# Altium PCB leboard.PcbDoc
Units mil, origin at the board's own origin, x right, y up, seen from the top; angles counter-clockwise.
Board outline 3500 x 3500 mil, 2 copper layers (Top Layer, Bottom Layer); 54 components, 58 nets, 178 pads, 40 vias.
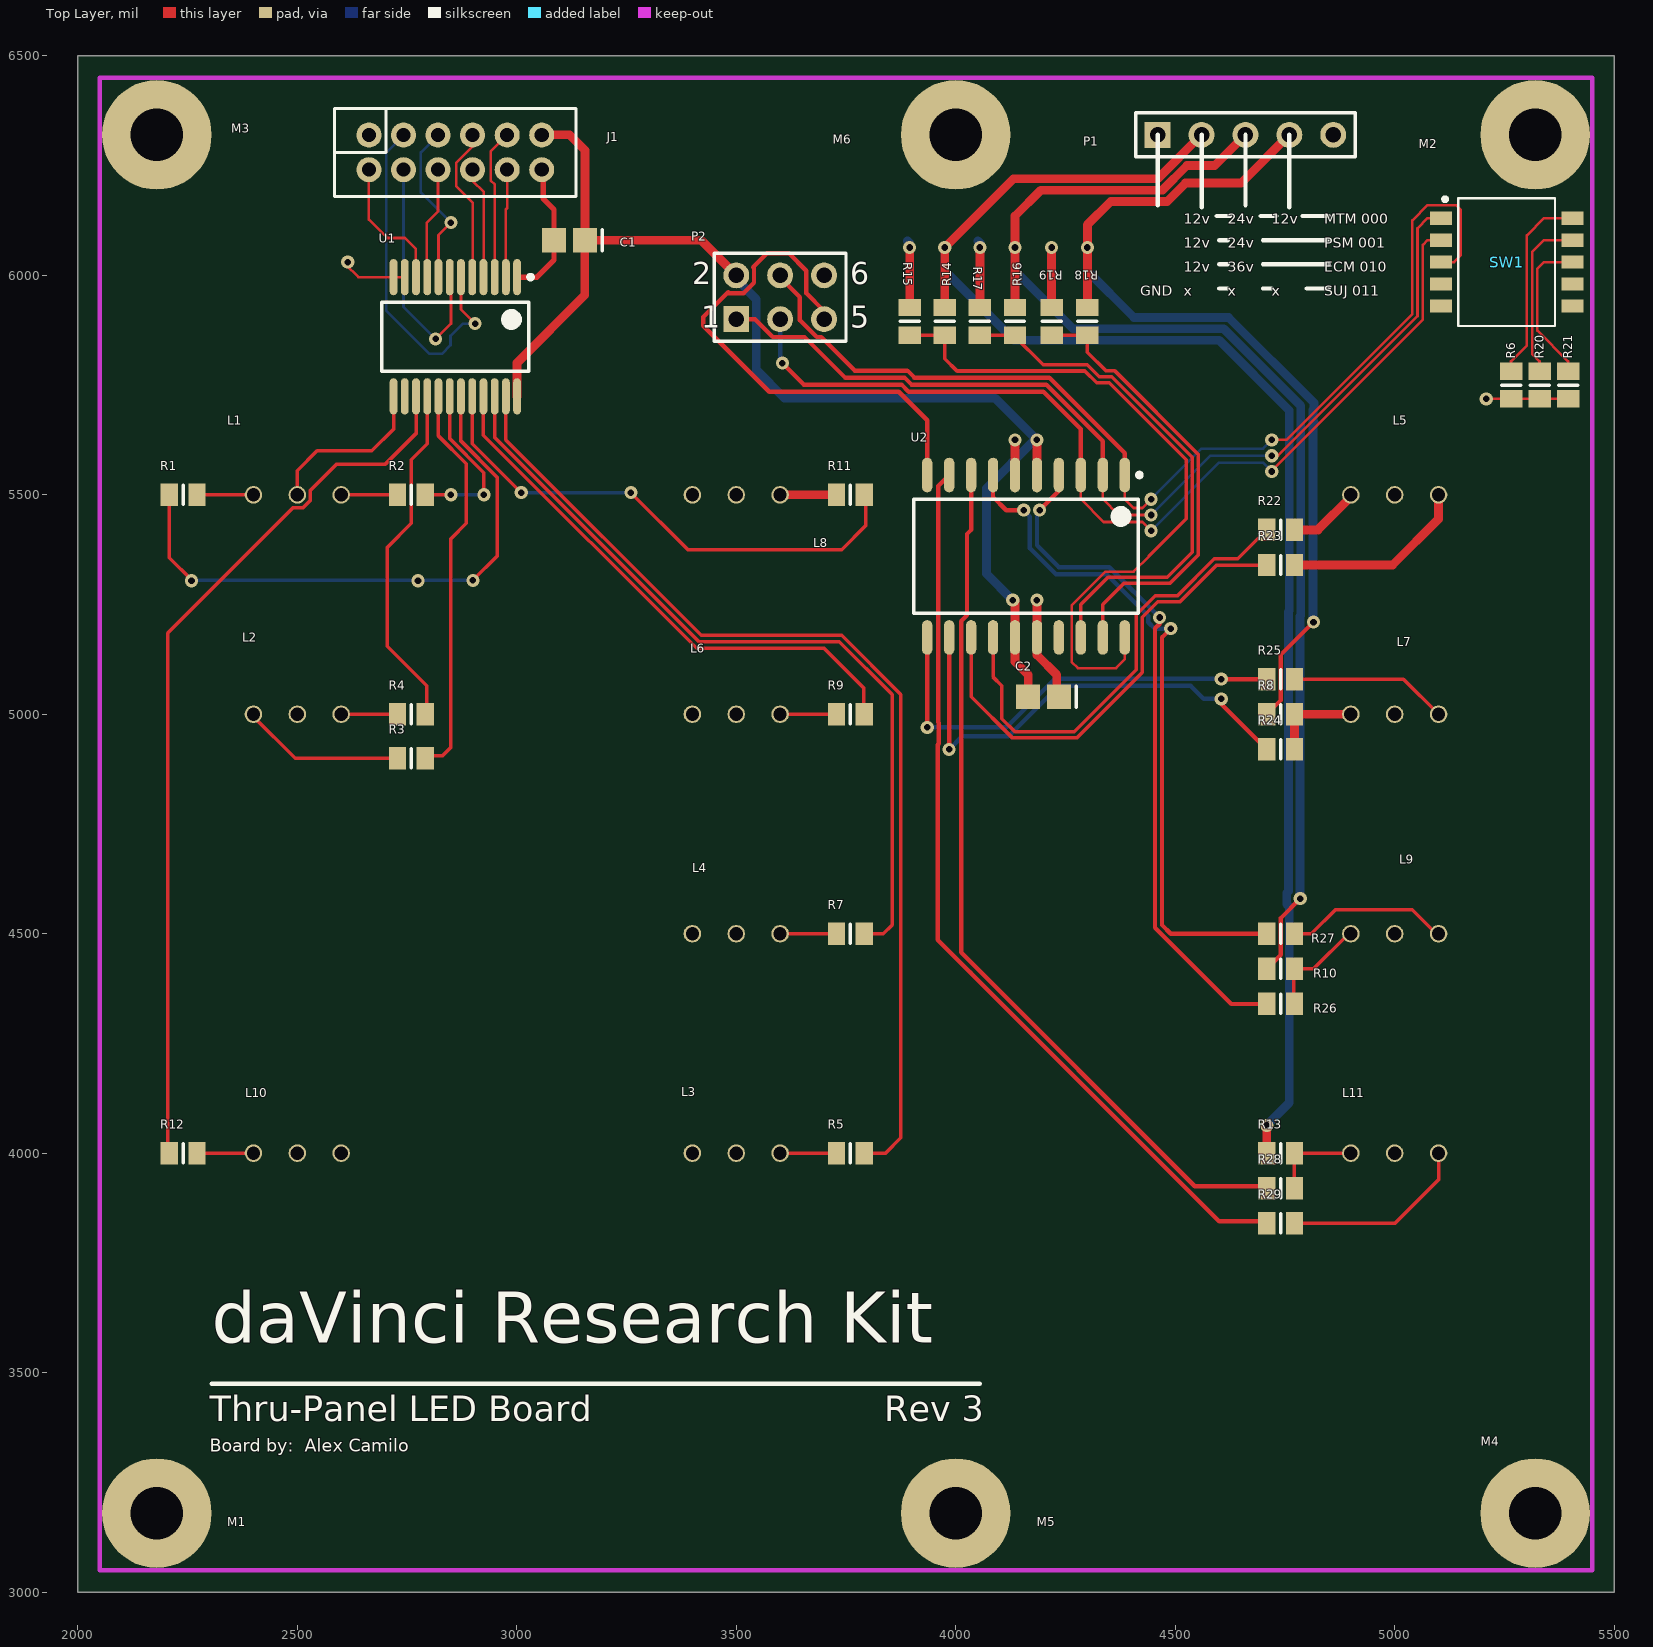
[diagram p0: Top Layer view]
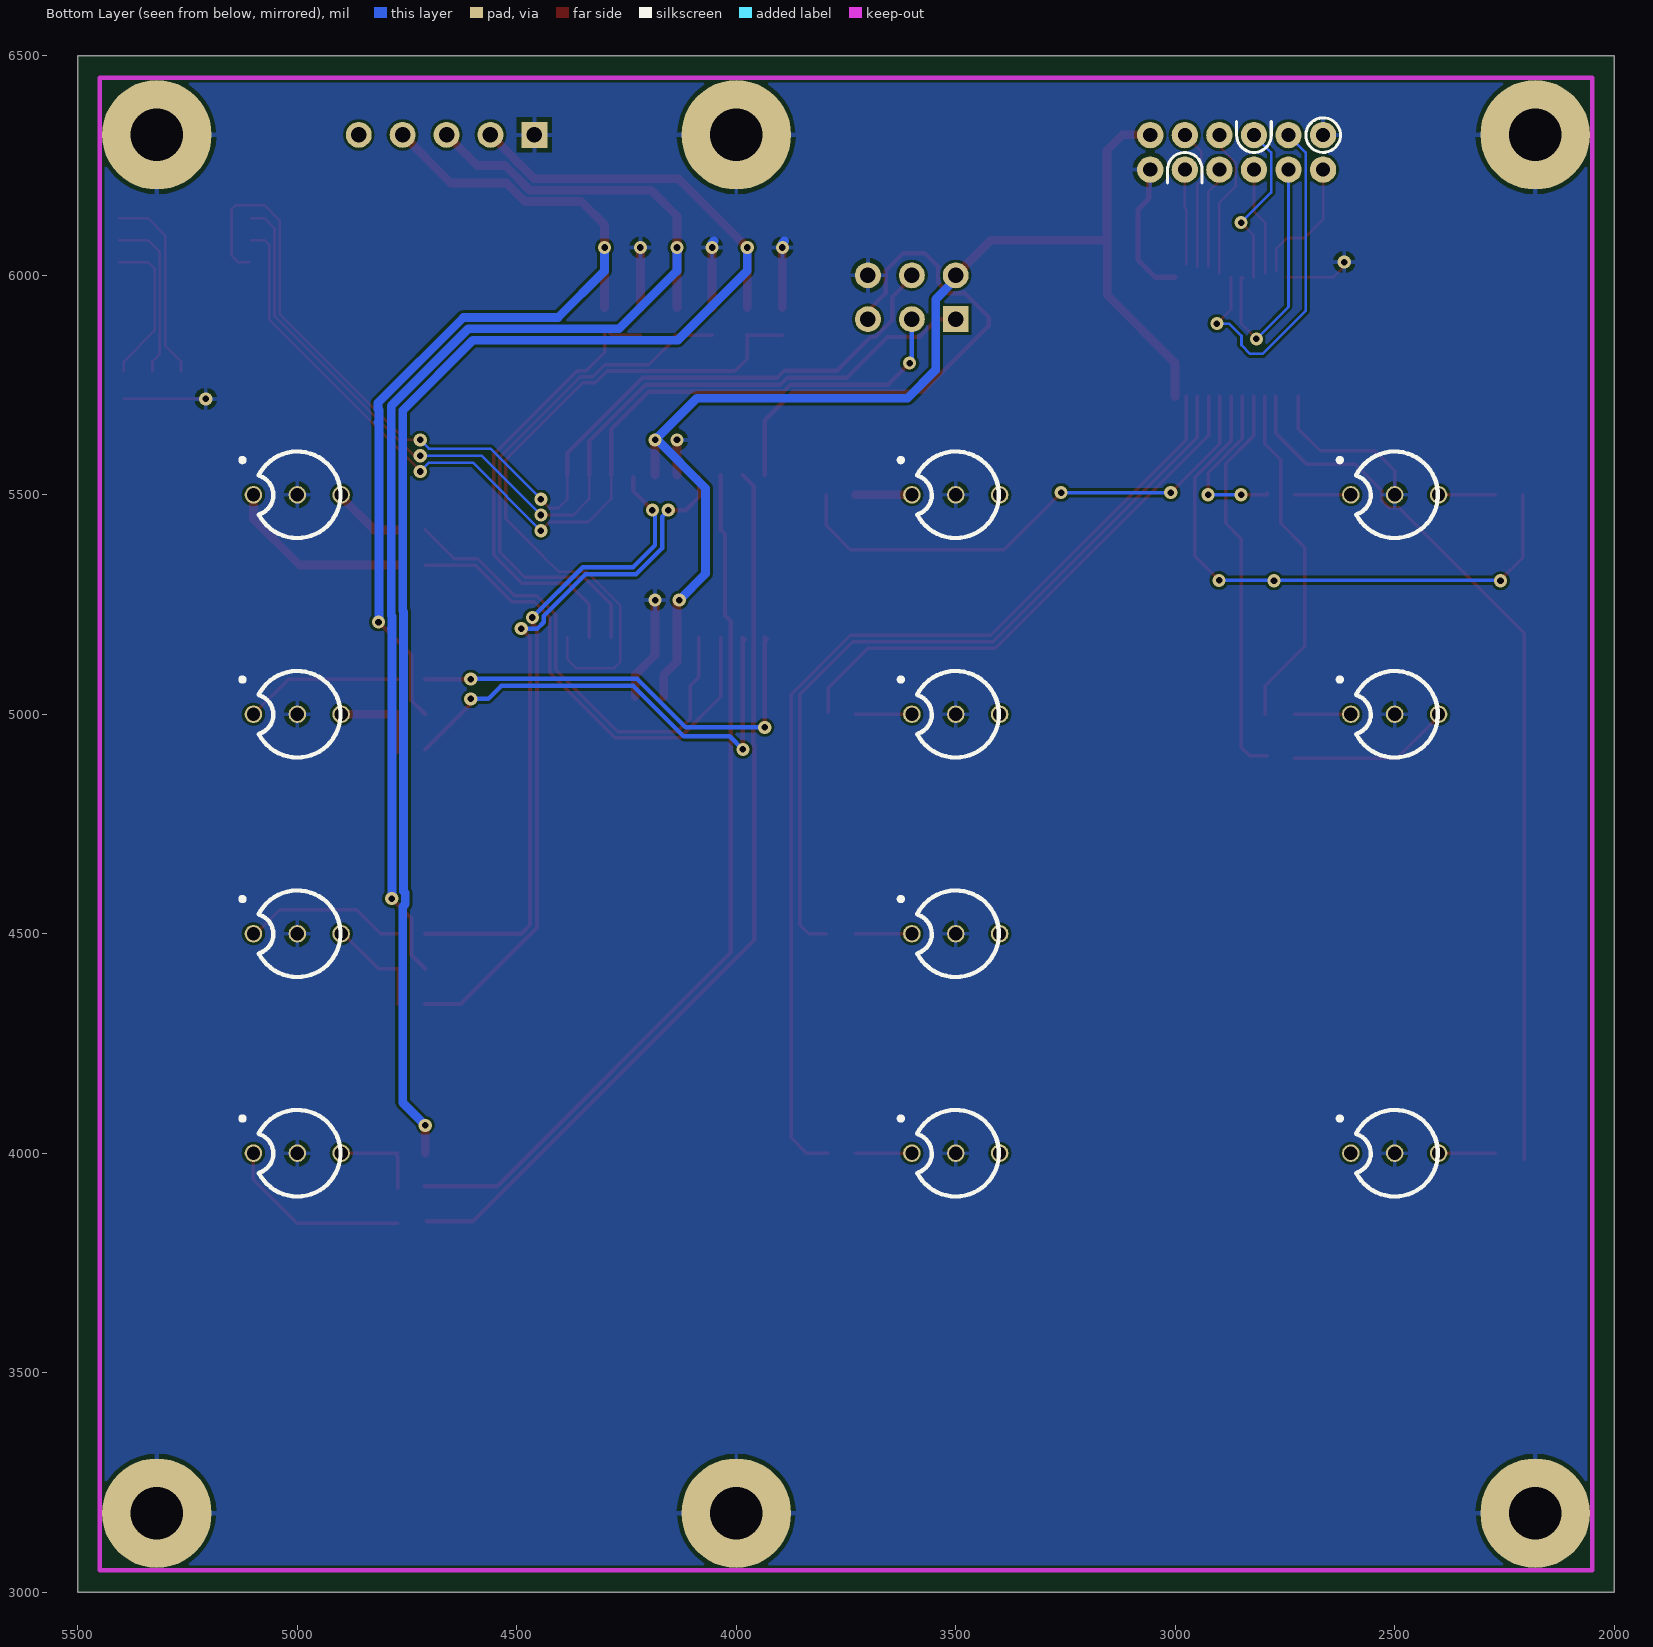
[diagram p1: Bottom Layer view, seen from below]

## Layer stack, top to bottom
Top Solder: solder mask 0.4, Solder Resist, Dk 3.5
Top Layer: signal copper 1.4
Dielectric1: dielectric 12.6, FR-4, Dk 4.8
Bottom Layer: signal copper 1.4
Bottom Solder: solder mask 0.4, Solder Resist, Dk 3.5

## Board outline
2000,3000 5500,3000 5500,6500 2000,6500

## Design rules (kind name [scope] priority, off if disabled: settings)
Clearance [All] p1: gap=6
HoleSize [All] p1: absolutevalues=TRUE maxlimit=300 minlimit=1 maxpercent=80.000 minpercent=20.000
HoleToHoleClearance [All] p1: gap=6 allowstackedmicrovias=TRUE
MinimumSolderMaskSliver [All] p1: minsoldermaskwidth=3
PolygonConnect [All] p1: connectstyle=Relief reliefconductorwidth=10 reliefentries=4 polygonreliefangle="90 Angle" airgapwidth=10
RoomDefinition board [InComponentClass('board')] p1: confinementstyle=ConfineIn formatcopy=TRUE lockcomponents=FALSE outline 0,0 2000,0 2000,1000 0,1000
RoutingVias [All] p1: holewidth=15 width=30 viastyle="Through Hole" minholewidth=15 minwidth=30 maxholewidth=200 maxwidth=200
SilkToSilkClearance [All] p1: silktosilkclearance=0
SilkToSolderMaskClearance SilkscreenOverComponentPads [IsPad] p1: minsilkscreentomaskgap=0 clearancetoexposedcopper=TRUE
SolderMaskExpansion [All] p1: expansion=4
Width [All] p1: maxlimit=50 minlimit=6 preferedwidth=6 minimp=50.000000 maximp=50.000000 favimp=50.000000
25 further rules are at their usual default settings.

## Components (designator, comment, footprint, x,y, rotation, side; value= is the part's Value field where it differs from the comment)
C1 "Cap Semi" CAPC2512L 3120,6080 r180 top
C2 "Cap Semi" CAPC2512L 4200,5040 r180 top
J1 "DF-11" HDR-6x2-2MM 2860,6280 r0 top
L1 "LTL-30EHJ" LTL-30EHJ 2500,5500 r0 top locked
L2 "LTL-30EHJ" LTL-30EHJ 2500,5000 r0 top locked
L3 "LTL-30EHJ" LTL-30EHJ 3500,4000 r0 top locked
L4 "LTL-30EHJ" LTL-30EHJ 3500,4500 r0 top locked
L5 "LTL-30EHJ" LTL-30EHJ 5000,5500 r0 top locked
L6 "LTL-30EHJ" LTL-30EHJ 3500,5000 r0 top locked
L7 "LTL-30EHJ" LTL-30EHJ 5000,5000 r0 top locked
L8 "LTL-30EHJ" LTL-30EHJ 3500,5500 r0 top locked
L9 "LTL-30EHJ" LTL-30EHJ 5000,4500 r0 top locked
L10 "LTL-30EHJ" LTL-30EHJ 2500,4000 r0 top locked
L11 "LTL-30EHJ" LTL-30EHJ 5000,4000 r0 top locked
M1 "MHOLE" MHOLE4 2180,3180 r0 top
M2 "MHOLE" MHOLE4 5320,6320 r0 top
M3 "MHOLE" MHOLE4 2180,6320 r0 top
M4 "MHOLE" MHOLE4 5320,3180 r0 top
M5 "MHOLE" MHOLE4 4000,3180 r0 top
M6 "MHOLE" MHOLE4 4000,6320 r0 top
P1 "Header 5" HDR1X5 4460,6320 r0 top
P2 "Header 3X2" HDR2X3 3500,5900 r0 top
R1 "Res Semi" RESC2012L 2240,5500 r0 top
R2 "Res Semi" RESC2012L 2760,5500 r180 top
R3 "Res Semi" RESC2012L 2760,4900 r180 top
R4 "Res Semi" RESC2012L 2760,5000 r180 top
R5 "Res Semi" RESC2012L 3760,4000 r180 top
R6 "Res Semi" RESC2012L 5265,5750 r90 top
R7 "Res Semi" RESC2012L 3760,4500 r180 top
R8 "Res Semi" RESC2012L 4740,5000 r0 top
R9 "Res Semi" RESC2012L 3760,5000 r180 top
R10 "Res Semi" RESC2012L 4740,4420 r0 top
R11 "Res Semi" RESC2012L 3760,5500 r180 top
R12 "Res Semi" RESC2012L 2240,4000 r0 top
R13 "Res Semi" RESC2012L 4740,4000 r0 top
R14 "Res Semi" RESC2012L 3975,5895 r90 top
R15 "Res Semi" RESC2012L 3895,5895 r270 top
R16 "Res Semi" RESC2012L 4135,5895 r90 top
R17 "Res Semi" RESC2012L 4055,5895 r270 top
R18 "Res Semi" RESC2012L 4300,5895 r90 top
R19 "Res Semi" RESC2012L 4218.33,5895 r270 top
R20 "Res Semi" RESC2012L 5330,5750 r90 top
R21 "Res Semi" RESC2012L 5395,5750 r90 top
R22 "Res Semi" RESC2012L 4740,5420 r0 top
R23 "Res Semi" RESC2012L 4740,5340 r0 top
R24 "Res Semi" RESC2012L 4740,4920 r0 top
R25 "Res Semi" RESC2012L 4740,5080 r0 top
R26 "Res Semi" RESC2012L 4740,4340 r0 top
R27 "Res Semi" RESC2012L 4740,4500 r0 top
R28 "Res Semi" RESC2012L 4740,3920 r0 top
R29 "Res Semi" RESC2012L 4740,3840 r0 top
SW1 "416131160805" 416131160805 5255,6030 r270 top
U1 "SN74LVC827ADBLE" DB024_N 2860,5860 r270 top
U2 "ATtiny26L-8SC" 20S_N 4160,5360 r270 top

## Footprints (in the part's own frame and the unit in brackets; to place one, negate y for a bottom-side part, rotate by r counter-clockwise, add the part's x,y. Pads: shape width x height; smd on the part's side, far side on the other; paste and mask are expansions set on the pad)
20S_N [mm] "SOIC, 20-Leads, Body 12.8x7.5mm, Pitch 1.27mm, IPC Medium Density"
  oval 2x0.6 smd: 1(-4.7,5.715) 2(-4.7,4.445) 3(-4.7,3.175) 4(-4.7,1.905) 5(-4.7,0.635) 6(-4.7,-0.635) 7(-4.7,-1.905) 8(-4.7,-3.175) 9(-4.7,-4.445) 10(-4.7,-5.715) 11(4.7,-5.715) 12(4.7,-4.445) 13(4.7,-3.175) 14(4.7,-1.905) 15(4.7,-0.635) 16(4.7,0.635) 17(4.7,1.905) 18(4.7,3.175) 19(4.7,4.445) 20(4.7,5.715)
  silkscreen extent -4.82,-6.5 3.3,6.69, body extent -3.8,-6.5 3.8,6.5, height 2.67
416131160805 [mm] "05p, 1.27mm Pitch, Horizontal, HP Type, SMT, flat Actuator, black, with Tape, T&R"
  rect 0.76x1.27 smd: 1(-2.54,-3.81) 2(-1.27,-3.81) 3(0,-3.81) 4(1.27,-3.81) 5(2.54,-3.81) 6(2.54,3.81) 7(1.27,3.81) 8(0,3.81) 9(-1.27,3.81) 10(-2.54,3.81)
  silkscreen extent -3.74,-3.66 3.69,2.8, body extent -3.69,-4 3.7,4, height 2.06
CAPC2512L [mm] "Chip Capacitor, Body 2.54x1.27mm, IPC High Density"
  rect 1.4x1.4 smd: 1(-0.9,0) 2(0.9,0)
  silkscreen extent -1.9,-0.6 -1.9,0.6, body extent -1.45,-0.82 1.45,0.82, height 1.3
DB024_N [mm] "SOP, 24-Leads, Body 8.2x5.3mm, Pitch 0.65mm, IPC Medium Density"
  oval 2.1x0.45 smd: 1(-3.45,3.575) 2(-3.45,2.925) 3(-3.45,2.275) 4(-3.45,1.625) 5(-3.45,0.975) 6(-3.45,0.325) 7(-3.45,-0.325) 8(-3.45,-0.975) 9(-3.45,-1.625) 10(-3.45,-2.275) 11(-3.45,-2.925) 12(-3.45,-3.575) 13(3.45,-3.575) 14(3.45,-2.925) 15(3.45,-2.275) 16(3.45,-1.625) 17(3.45,-0.975) 18(3.45,-0.325) 19(3.45,0.325) 20(3.45,0.975) 21(3.45,1.625) 22(3.45,2.275) 23(3.45,2.925) 24(3.45,3.575)
  silkscreen extent -3.57,-4.25 2,4.48, body extent -2.7,-4.25 2.7,4.25, height 2
HDR1X5 [mm] "Connector; Header; 5 Position"
  rect 1.5x1.5 hole 0.9: 1(0,0)
  round 1.5 hole 0.9: 2(2.54,0) 3(5.08,0) 4(7.62,0) 5(10.16,0)
  silkscreen extent -1.27,-1.27 11.43,1.27
HDR2X3 [mm] "Connector; Header; 3x2 Position"
  rect 1.5x1.5 hole 0.9: 1(0,0)
  round 1.5 hole 0.9: 2(0,2.54) 3(2.54,0) 4(2.54,2.54) 5(5.08,0) 6(5.08,2.54)
  silkscreen extent -1.27,-1.27 6.35,3.81
HDR-6x2-2MM [mil]
  round 57 / inner round 60 / far side round 60 hole 32: 1(-196.85,39.37) 2(-196.85,-39.37) 3(-118.11,39.37) 4(-118.11,-39.37) 5(-39.37,39.37) 6(-39.37,-39.37) 7(39.37,39.37) 8(39.37,-39.37) 9(118.11,39.37) 10(118.11,-39.37) 11(196.85,39.37) 12(196.85,-39.37)
  silkscreen extent -275,-100 275,100
LTL-30EHJ [mil]
  round 40 hole 30: 1(100,0) 2(0,0) 3(-100,0)
MHOLE4 [mil]
  round 250 / inner round 60 / far side round 250 hole 120: 1(0,0)
RESC2012L [mm] "Chip Resistor, Body 2.0x1.3mm, IPC High Density"
  rect 1x1.3 smd: 1(-0.8,0) 2(0.8,0)
  silkscreen extent 0,-0.55 0,0.55, body extent -1.07,-0.7 1.07,0.7, height 2.54

## Part data
C1 C2: "Capacitor (Semiconductor SIM Model)"
J1: library part "HEADER 6X2-1"
M1 M2 M3 M4 M5 M6: "Mounting Hole"
P1: "Header, 5-Pin"
P2: "Header, 3-Pin, Dual row"
R1 R2 R3 R4 R5 R6 R7 R8 R9 R10 R11 R12 R13 R14 R15 R16 R17 R18 R19 R20 R21 R22 R23 R24 R25 R26 R27 R28 R29: "Semiconductor Resistor"
SW1: library part CMP-1433-00005-1, "WS-DISV 1.27 mm small compact SMD Dip Switch with top tape"
U1: "10-Bit Buffer/Driver with 3-State Outputs"
U2: "8-Bit AVR Microcontroller with 2K Bytes of Flash Memory"

## Via types
v1: diameter 30, hole 15, Top Layer to Bottom Layer, tented both sides, 40 vias

## Nets (pads, with @x,y where several pads share a name; then routed paths per layer and width w, separated by ;. In a path a pad name is that pad's centre, name@x,y a point inside that pad or via, vN(x,y) a via of type N, cw(c..) or ccw(c..) an arc to the next point about the centre after c; other vN are vias at no path point)
/FAULT1: J1.7 U1.5 | length 345.7
  Top Layer w6: J1.7 2899.37,6293.66 2861.87,6256.16 2861.87,6203.13 2899.37,6165.63 2899.37,6005.63 U1.5@2900,6005
/FAULT2: J1.8 U1.4 | length 231.2
  Top Layer w6: J1.8 2899.37,6215.13 2925,6189.5 U1.4@2925,6020
/FAULT3: J1.9 U1.3 | length 318.8
  Top Layer w6: U1.3@2950,6020 2950,6206.32 2940.61,6215.71 2940.61,6281.87 J1.9
/FAULT4: J1.10 U1.2 | length 216.9
  Top Layer w6: U1.2@2975,6025 2975,6150 2978.11,6153.11 J1.10
BUFF1: R11.1 U1.20 | length 1197
  Top Layer w8: U1.20 2898.39,5616.61 v1(3010,5505) ; v1(3260,5505) 3390,5375 3740,5375 3795,5430 R11.1@3795,5500
  Bottom Layer w8: v1(3010,5505) v1(3260,5505)
BUFF2: R9.1 U1.21 | length 1247.8
  Top Layer w8: U1.21 2923.98,5636.02 3410,5150 3700,5150 3790,5060 R9.1@3790,5005
BUFF3: R7.1 U1.22 | length 1835
  Top Layer w8: U1.22 2949.57,5630.43 3415,5165 3735,5165 3855,5045 3855,4520 3835,4500 R7.1@3795,4500
BUFF4: R5.1 U1.23 | length 2348.8
  Top Layer w8: U1.23 2975.16,5624.84 3420,5180 3740,5180 3875,5045 3875,4035 3840,4000 R5.1 R5.1@3790,4000
BUFFMVGOOD: R12.1 U1.15 | length 2051.5
  Top Layer w8: R12.1@2205,3985 2205,4055 2205,5185 2490,5470 2512.43,5470 2530,5487.57 2530,5510 2590,5570 2700.87,5570 2770.43,5639.57 U1.15
BUFL1G: R1.1 U1.19 | length 1332.3
  Top Layer w8: R1.1 2208.5,5356.5 v1@2260,5305 ; U1.19 2872.8,5622.41 2955,5540.2 2955,5360 v1(2900,5305)
  Bottom Layer w8: v1@2260,5305 v1(2900,5305)
  other v1: 2259,5304 2775,5304
BUFL1R: R2.1 U1.18 | length 396.4
  Top Layer w8: R2.1@2790,5505 2790,5500 R2.1 v1(2850,5500) ; U1.18 2847.2,5628.2 2925,5550.4 v1(2925,5500)
  Bottom Layer w8: v1(2850,5500) v1(2925,5500)
BUFL2G: R3.1 U1.17 | length 908.2
  Top Layer w8: R3.1@2790,4905 2830,4905 2850,4925 2850,5400 2885,5435 2885,5570.6 2821.61,5633.99 U1.17
BUFL2R: R4.1 U1.16 | length 799.2
  Top Layer w8: R4.1@2795,5000 2795,5065 2705,5155 2705,5380 2760,5435 2760,5580 2796.02,5616.02 U1.16
GB1: L5.3 R22.2 | length 159.6
  Top Layer w20: R22.2 4825,5420 L5.3@4900,5495
GB2: L7.3 R8.2 R24.2 | length 187
  Top Layer w20: R24.2 R8.2@4771.5,4983.5 ; R8.2 L7.3@4895,5000
GB3: L9.3 R10.2 R26.2 | length 237.3
  Top Layer w8: R10.2@4770,4420 4770,4341.5 R26.2 ; R10.2 4815,4420 L9.3@4895,4500
GB4: L11.3 R13.2 R28.2 | length 205
  Top Layer w8: R28.2 4771.5,3991.5 R13.2@4775,3995 ; R13.2 L11.3
GND: C1.2 C2.1 J1.1 J1.12 L1.2 L2.2 L3.2 L4.2 L5.2 L6.2 L7.2 L8.2 L9.2 L10.2 L11.2 M1.1 M2.1 M3.1 M4.1 M5.1 M6.1 P1.1 P2.6 R6.1 R15.1 R17.1 R19.1 R20.1 R21.1 U1.1 U1.11 U1.12 U1.13 U2.6 U2.16 | length 1773
  Top Layer w6: v1(2615,6030) 2610,6025 2639.17,5995.83 U1.12 ; U1.12@2720.83,5995.83 U1.11 ; v1(5208.5,5718.5) R6.1 R20.1 R21.1
  Top Layer w8: L1.2@2500,5505 2500,5555 2545,5600 2670,5600 2719.25,5649.25 U1.13
  Top Layer w12: U1.1 3045.83,5995.83 3085,6035 3085,6150 3060,6175 J1.12@3060,6240
  Top Layer w20: R15.1 v1@3895,6060 ; R17.1 v1@4055,6060 ; U2.6 v1(4135,5625) ; v1(4185,5260) U2.16 4185,5135 4230,5090 C2.1@4230,5040 ; R19.1 v1@4218.33,6061.67
  Top Layer w25: J1.12 J1.12@3057,6240.63
  Bottom Layer w20: 3890,6078.33 v1@3895,6073.33 ; 4050,6078.33 v1@4055,6073.33
  other v1: 3895,6063.33 4055,6063.33 4218.33,6063.33
LED1-GRN: J1.3 U1.6 | length 824.2
  Top Layer w6: U1.6 2872.8,5922.2 v1(2905,5890)
  Bottom Layer w6: J1.3@2740,6325 2740,6316.74 2702.89,6279.63 2702.89,5919.03 2800.92,5821 2829.08,5821 2849,5840.92 2849,5862.03 2876.97,5890 v1(2905,5890)
LED1-RED: J1.4 U1.7 | length 573.5
  Top Layer w6: v1(2815,5855) 2850,5890 U1.7@2850,5995 ; U1.7@2845,5993.62 U1.7
  Bottom Layer w6: J1.4 2741.89,5928.11 v1(2815,5855)
LED2-GRN: J1.5 U1.8 | length 385.1
  Top Layer w6: U1.8 2821.61,6091.61 v1(2850,6120)
  Bottom Layer w6: J1.5@2820,6325 2820,6318 2781.63,6279.63 2781.63,6188.37 v1(2850,6120)
LED2-RED: J1.6 U1.9 | length 246.2
  Top Layer w6: U1.9@2795,6005 2795,6120 2820.63,6145.63 J1.6
MISO: P2.1 SW1.1 U2.2 | length 2264.4
  Top Layer w6: U2.2 4335,5490 4371,5454 v1(4445,5454) ; v1(4720,5589) 4734,5589 5052,5907 5052,6107 5075,6130 SW1.1
  Top Layer w10: P2.1 3542.69,5900 3583.21,5859.47 3655.53,5859.47 3748,5767 3883.25,5767 3899.25,5751 4206.37,5751 4335,5622.37 U2.2
  Bottom Layer w6: v1(4445,5454) 4580,5589 v1(4720,5589)
MOSI: P2.4 SW1.3 U2.1 | length 2425.6
  Top Layer w6: U2.1 4385,5490 4405,5470 4425,5470 v1(4445,5490) ; v1(4720,5625) 4753.03,5625 5040,5911.97 5040,6125 5075,6160 5140,6160 5150,6150 5150,6045 5135,6030 SW1.3@5110,6030
  Top Layer w10: P2.4@3600,5995 3645,5950 3645,5897.69 3683.21,5859.47 3693.53,5859.47 3770,5783 3889.88,5783 3905.88,5767 4213,5767 4385,5595 U2.1
  Bottom Layer w6: v1(4445,5490) 4560,5605 4700,5605 v1(4720,5625)
MV-GOOD: J1.2 U1.10 | length 298.3
  Top Layer w6: J1.2 2663.15,6126.85 2705,6085 2745,6085 2770,6060 U1.10@2770,6010
NetL1_1: L1.1 R2.2 | length 137
  Top Layer w8: L1.1 2602,5500 R2.2
  Top Layer w10: L1.1@2596,5506 L1.1@2602,5500
NetL1_3: L1.3 R1.2 | length 128.5
  Top Layer w8: R1.2 L1.3
NetL2_1: L2.1 R4.2 | length 128.5
  Top Layer w8: L2.1 R4.2
NetL2_3: L2.3 R3.2 | length 372.9
  Top Layer w8: L2.3@2405,4995 2400,4995 2495,4900 R3.2
NetL3_1: L3.1 R5.2 | length 128.5
  Top Layer w8: L3.1 R5.2
NetL4_1: L4.1 R7.2 | length 128.5
  Top Layer w8: L4.1 R7.2
NetL5_1: L5.1 R23.2 | length 422
  Top Layer w20: R23.2 4995,5340 5100,5445 L5.1@5100,5495
NetL6_1: L6.1 R9.2 | length 128.5
  Top Layer w8: L6.1 R9.2
NetL7_1: L7.1 R25.2 | length 361.6
  Top Layer w8: R25.2 5020,5080 L7.1
NetL8_1: L8.1 R11.2 | length 128.5
  Top Layer w20: L8.1 R11.2
NetL9_1: L9.1 R27.2 | length 369.1
  Top Layer w8: R27.2 4810,4500 4865,4555 5040,4555 L9.1@5095,4500
NetL10_3: L10.3 R12.2 | length 128.5
  Top Layer w8: R12.2 L10.3
NetL11_1: L11.1 R29.2 | length 429.9
  Top Layer w8: R29.2 5000,3840 5100,3940 L11.1
NetR6_2: R6.2 SW1.10 | length 444.6
  Top Layer w6: R6.2 5265,5804.18 5301,5840.18 5301,6091 5340,6130 SW1.10
NetR20_2: R20.2 SW1.9 | length 381.7
  Top Layer w6: R20.2 5330,5804.18 5313,5821.18 5313,6053 5340,6080 SW1.9
NetR21_2: R21.2 SW1.8 | length 348.7
  Top Layer w6: R21.2 5395,5804.18 5325,5874.18 5325,6015 5340,6030 SW1.8
P1G: R23.1 U2.13 | length 1084.2
  Top Layer w8: U2.13 4035,5040.2 4129.2,4946 4275.8,4946 4425,5095.2 4425,5221 4460,5256 4511,5256 4595,5340 R23.1
P1R: R22.1 U2.14 | length 1073.4
  Top Layer w8: U2.14 4085,5085 4105,5065 4105,4990 4135,4960 4270,4960 4411,5101 4411,5226.8 4454.2,5270 4505.2,5270 4589.2,5354 4642.5,5354 R22.1
P2G: R25.1 U2.11 | length 1025.5
  Top Layer w10: v1@3930,4970 3935,4975 U2.11 ; v1(4605,5080) R25.1
  Bottom Layer w10: v1(3935,4970) 4115,4970 4226,5081 v1@4604,5081
P2R: R24.1 U2.12 | length 1100.3
  Top Layer w10: v1@3985,4925 U2.12 ; v1(4605,5035) 4605,5023.5 R24.1
  Bottom Layer w10: v1(3985,4920) 4015,4950 4120,4950 4235,5065 4535,5065 4565,5035 v1(4605,5035)
P3G: R27.1 U2.7 | length 1568.8
  Top Layer w10: U2.7@4085,5540 4085,5495 4115,5465 v1(4155,5465) v1@4140,5465 ; v1(4490,5195) 4470,5175 4470,4520 4490,4500 R27.1
  Bottom Layer w10: v1@4155,5464 4169,5450 4169,5378.37 4228.37,5319 4343.37,5319 4438.54,5223.83 4438.54,5209.69 4453.77,5194.46 v1@4489.46,5194.46
P3R: R26.1 U2.4 | length 1561.2
  Top Layer w10: v1(4191,5465) 4235,5509 U2.4@4235,5540 ; v1(4464.54,5220.46) 4464.54,5206.31 4454,5195.77 4454,4513.37 4627.37,4340 R26.1
  Bottom Layer w10: v1(4191,5465) 4185,5459 4185,5385 4235,5335 4350,5335 v1(4464.54,5220.46)
P4G: R29.1 U2.9 | length 2085
  Top Layer w10: U2.9 3960,5520.04 3960,4981.77 3961,4980.77 3961,4932.77 3959,4930.77 3959,4486 4035,4410 ; 4033,4412 4035,4410 ; R29.1@4705,3845 4600,3845 4035,4410
P4R: R28.1 U2.8 | length 2015.3
  Top Layer w10: U2.8 4035,5420 4025.55,5410.55 4025.55,5225.33 4012.19,5211.97 4012.19,4457.56 4544.75,3925 R28.1@4710,3925
RST: P2.5 U2.10 | length 1212.2
  Top Layer w10: P2.5@3700,5895 P2.5 3700,5918.94 3659.47,5959.47 3659.47,6010.53 3620,6050 3570,6050 3538.66,6018.66 3540.53,6016.79 3540.53,5983.21 3516.79,5959.47 3483.21,5959.47 3481.34,5961.34 3425,5905 3425,5885 3575,5735 3870,5735 3935,5670 U2.10
SCK: P2.3 SW1.2 U2.3 | length 2247.5
  Top Layer w6: U2.3 4285,5490 4337,5438 4425,5438 v1(4445,5418) ; v1(4720,5553) 4720,5555.06 5064,5899.06 5064,6069 5075,6080 SW1.2
  Top Layer w10: v1(3605,5800) 3654,5751 3876.63,5751 3892.63,5735 4199.75,5735 4285,5649.75 U2.3
  Bottom Layer w6: v1(4445,5418) 4600,5573 4700,5573 v1(4720,5553)
  Bottom Layer w10: P2.3 3600,5810 v1@3610,5800
V1IN: P1.2 R13.1 R14.2 | length 3513.2
  Top Layer w20: R14.2 v1@3975,6060 ; v1(3975,6063.33) 4131.67,6220 4460,6220 P1.2 ; R13.1 v1(4708.5,4063.5)
  Bottom Layer w20: v1(3975,6063.33) 3975,6010 4133,5852 4600,5852 4760,5692 4760,5235.61 4758,5233.61 4758,4596.84 4754,4592.84 4754,4567.16 4760,4561.16 4760,4115 v1(4708.5,4063.5)
V2IN: P1.3 R10.1 R16.2 | length 2955.3
  Top Layer w10: R10.1 4740.81,4452.31 4740.81,4535.81 v1(4785,4580)
  Top Layer w20: R16.2 v1@4135,6060 ; v1@4135,6065 4135,6135 4194,6194 4470.77,6194 4526.77,6250 4590,6250 P1.3
  Bottom Layer w20: v1(4135,6063.33) 4135,6010 4267,5878 4610.77,5878 4786,5702.77 4786,5224.84 4784,5222.84 4784,5197.16 ; v1(4785,4580) 4784,4581 4784,5197.16 ; 4786,5195.16 4784,5197.16
V3IN: P1.4 R8.1 R18.2 | length 2178.5
  Top Layer w10: R8.1 4740,5031.5 4740,5135 v1(4815,5210)
  Top Layer w20: R18.2 v1@4300,6060 ; v1@4300,6065 4300,6115 4353,6168 4481.54,6168 4523.54,6210 4650,6210 P1.4
  Bottom Layer w20: v1(4300,6063.33) 4300,6010 4406,5904 4621.54,5904 4816,5709.54 4816,5694.84 4814,5692.84 4814,5667.16 ; v1@4814,5211 4814,5667.16 ; 4816,5665.16 4814,5667.16
VCC: C1.1 C2.2 J1.11 P2.2 U1.24 U2.5 U2.15 | length 2811.9
  Top Layer w20: U1.24 3000.75,5800.75 3155,5955 C1.1@3155,6085 ; J1.11@3055,6320 3056.22,6320 J1.11 ; J1.11@3070,6320 3120,6320 3155.43,6284.57 C1.1 3420,6080 P2.2 ; v1(4130,5260) 4135,5260 U2.15 4135,5120 4165,5090 C2.2@4165,5040 ; U2.5 v1(4185,5625)
  Bottom Layer w20: P2.2@3505,6005 3505,5986.06 3545.53,5945.53 3545.53,5784.47 3610,5720 4090,5720 v1@4182.5,5627.5 ; v1(4130,5260) 4070,5320 4070,5515 v1@4182.5,5627.5 ; v1(4185,5625) v1@4182.5,5627.5 ; v1@4185,5630 v1@4182.5,5627.5
VS1: R14.1 R15.2 U2.20 | length 1572.7
  Top Layer w6: U2.20 4385,5125 4365,5105 4278.38,5105 4264.19,5119.19 4264.19,5247.57 4341.62,5325 4405,5325 4441,5361
  Top Layer w8: R15.2 R14.1 ; R14.1@3975,5865 R14.1 ; R14.1@3976.5,5863.5 R14.1 ; 4441,5361 4525,5445 4525,5580 4350,5755 4321.21,5755 4294.21,5782 4003,5782 3975,5810 R14.1
VS2: R16.1 R17.2 U2.18 | length 1197.6
  Top Layer w8: R17.2@4055,5865 R17.2 R16.1@4138.5,5863.5 ; R16.1@4135,5860 4199,5796 4300.01,5796 4327.01,5769 4355.8,5769 4539,5585.8 4539,5369.2 4481.8,5312 4347,5312 4285,5250 U2.18
VS3: R18.1 R19.2 U2.19 | length 1037.2
  Top Layer w8: R19.2 4283.5,5863.5 R18.1@4290,5870 ; R18.1@4300,5870 R18.1 4300,5825 4342,5783 4361.6,5783 4553,5591.6 4553,5363.4 4487.6,5298 4383,5298 4335,5250 U2.19
pads on no net: L3.3 L4.3 L6.3 L8.3 L10.1 P1.5 SW1.4 SW1.5 SW1.6 SW1.7 U1.14 U2.17

## Polygon pours and split planes (outlines as drawn)
GND on Bottom Layer "Top Layer-No Net 1" (solid, pour order 1000): 2050,3045 2053,3048 5446,3048 5446,6447 5441,6452 2050,6452

## Keep-outs
Keep-Out Layer:
  lines w10: 2050,3050 2050,6450 5450,6450 5450,3050 2050,3050

## Silkscreen, mask and mechanical layers (free items; w line width, h text height)
Top Overlay:
  lines w10: 2305,3475 4055,3475 ; 4460,6160 4460,6320 ; 4560,6155 4560,6320 ; 4595,6135 4625,6135 ; 4600,5970 4620,5970 ; 4600,6025 4620,6025 ; 4600,6080 4620,6080 ; 4660,6160 4660,6320 ; 4695,6135 4730,6135 ; 4700,5970 4720,5970 ; 4700,6025 4850,6025 ; 4700,6080 4850,6080 ; 4760,6155 4760,6320 ; 4790,6135 4850,6135 ; 4800,5970 4850,5970
  text "12v" at 4520,6110 h40
  text "24v" at 4620,6110 h40
  text "12v" at 4720,6110 h40
  text "MTM 000" at 4840,6110 h40
  text "12v" at 4520,6055 h40
  text "24v" at 4620,6055 h40
  text "PSM 001" at 4840,6055 h40
  text "12v" at 4520,6000 h40
  text "36v" at 4620,6000 h40
  text "ECM 010" at 4840,6000 h40
  text "GND" at 4420,5945 h40
  text "x" at 4520,5945 h40
  text "x" at 4620,5945 h40
  text "x" at 4720,5945 h40
  text "SUJ 011" at 4840,5945 h40
  text "daVinci Research Kit" at 2305,3530 h200
  text "Thru-Panel LED Board" at 2300,3370 h100
  text "Rev 3" at 3837.28,3370 h100
  text "Board by:  Alex Camilo" at 2300,3310 h50
Mechanical 16:
  the board outline again, w10

## Dimensions
2050,3050 to 2050,6450 on Mechanical 1
2050,3050 to 5450,3050 on Mechanical 1

## Text inside footprints (layer, text, board x,y; h text height)
P2: Top Overlay "1" at 3420,5880 h50; Top Overlay "2" at 3400,5980 h50; Top Overlay "5" at 3760,5880 h50; Top Overlay "6" at 3760,5980 h50